# Altium PCB ATSAM4C-CB.PcbDoc (part 1 of 2)
Units mil, origin at the board's own origin, x right, y up, seen from the top; angles counter-clockwise.
Board outline 3937.01 x 5511.81 mil, 2 copper layers (Top Layer, Bottom Layer); 213 components, 172 nets, 705 pads, 473 vias.
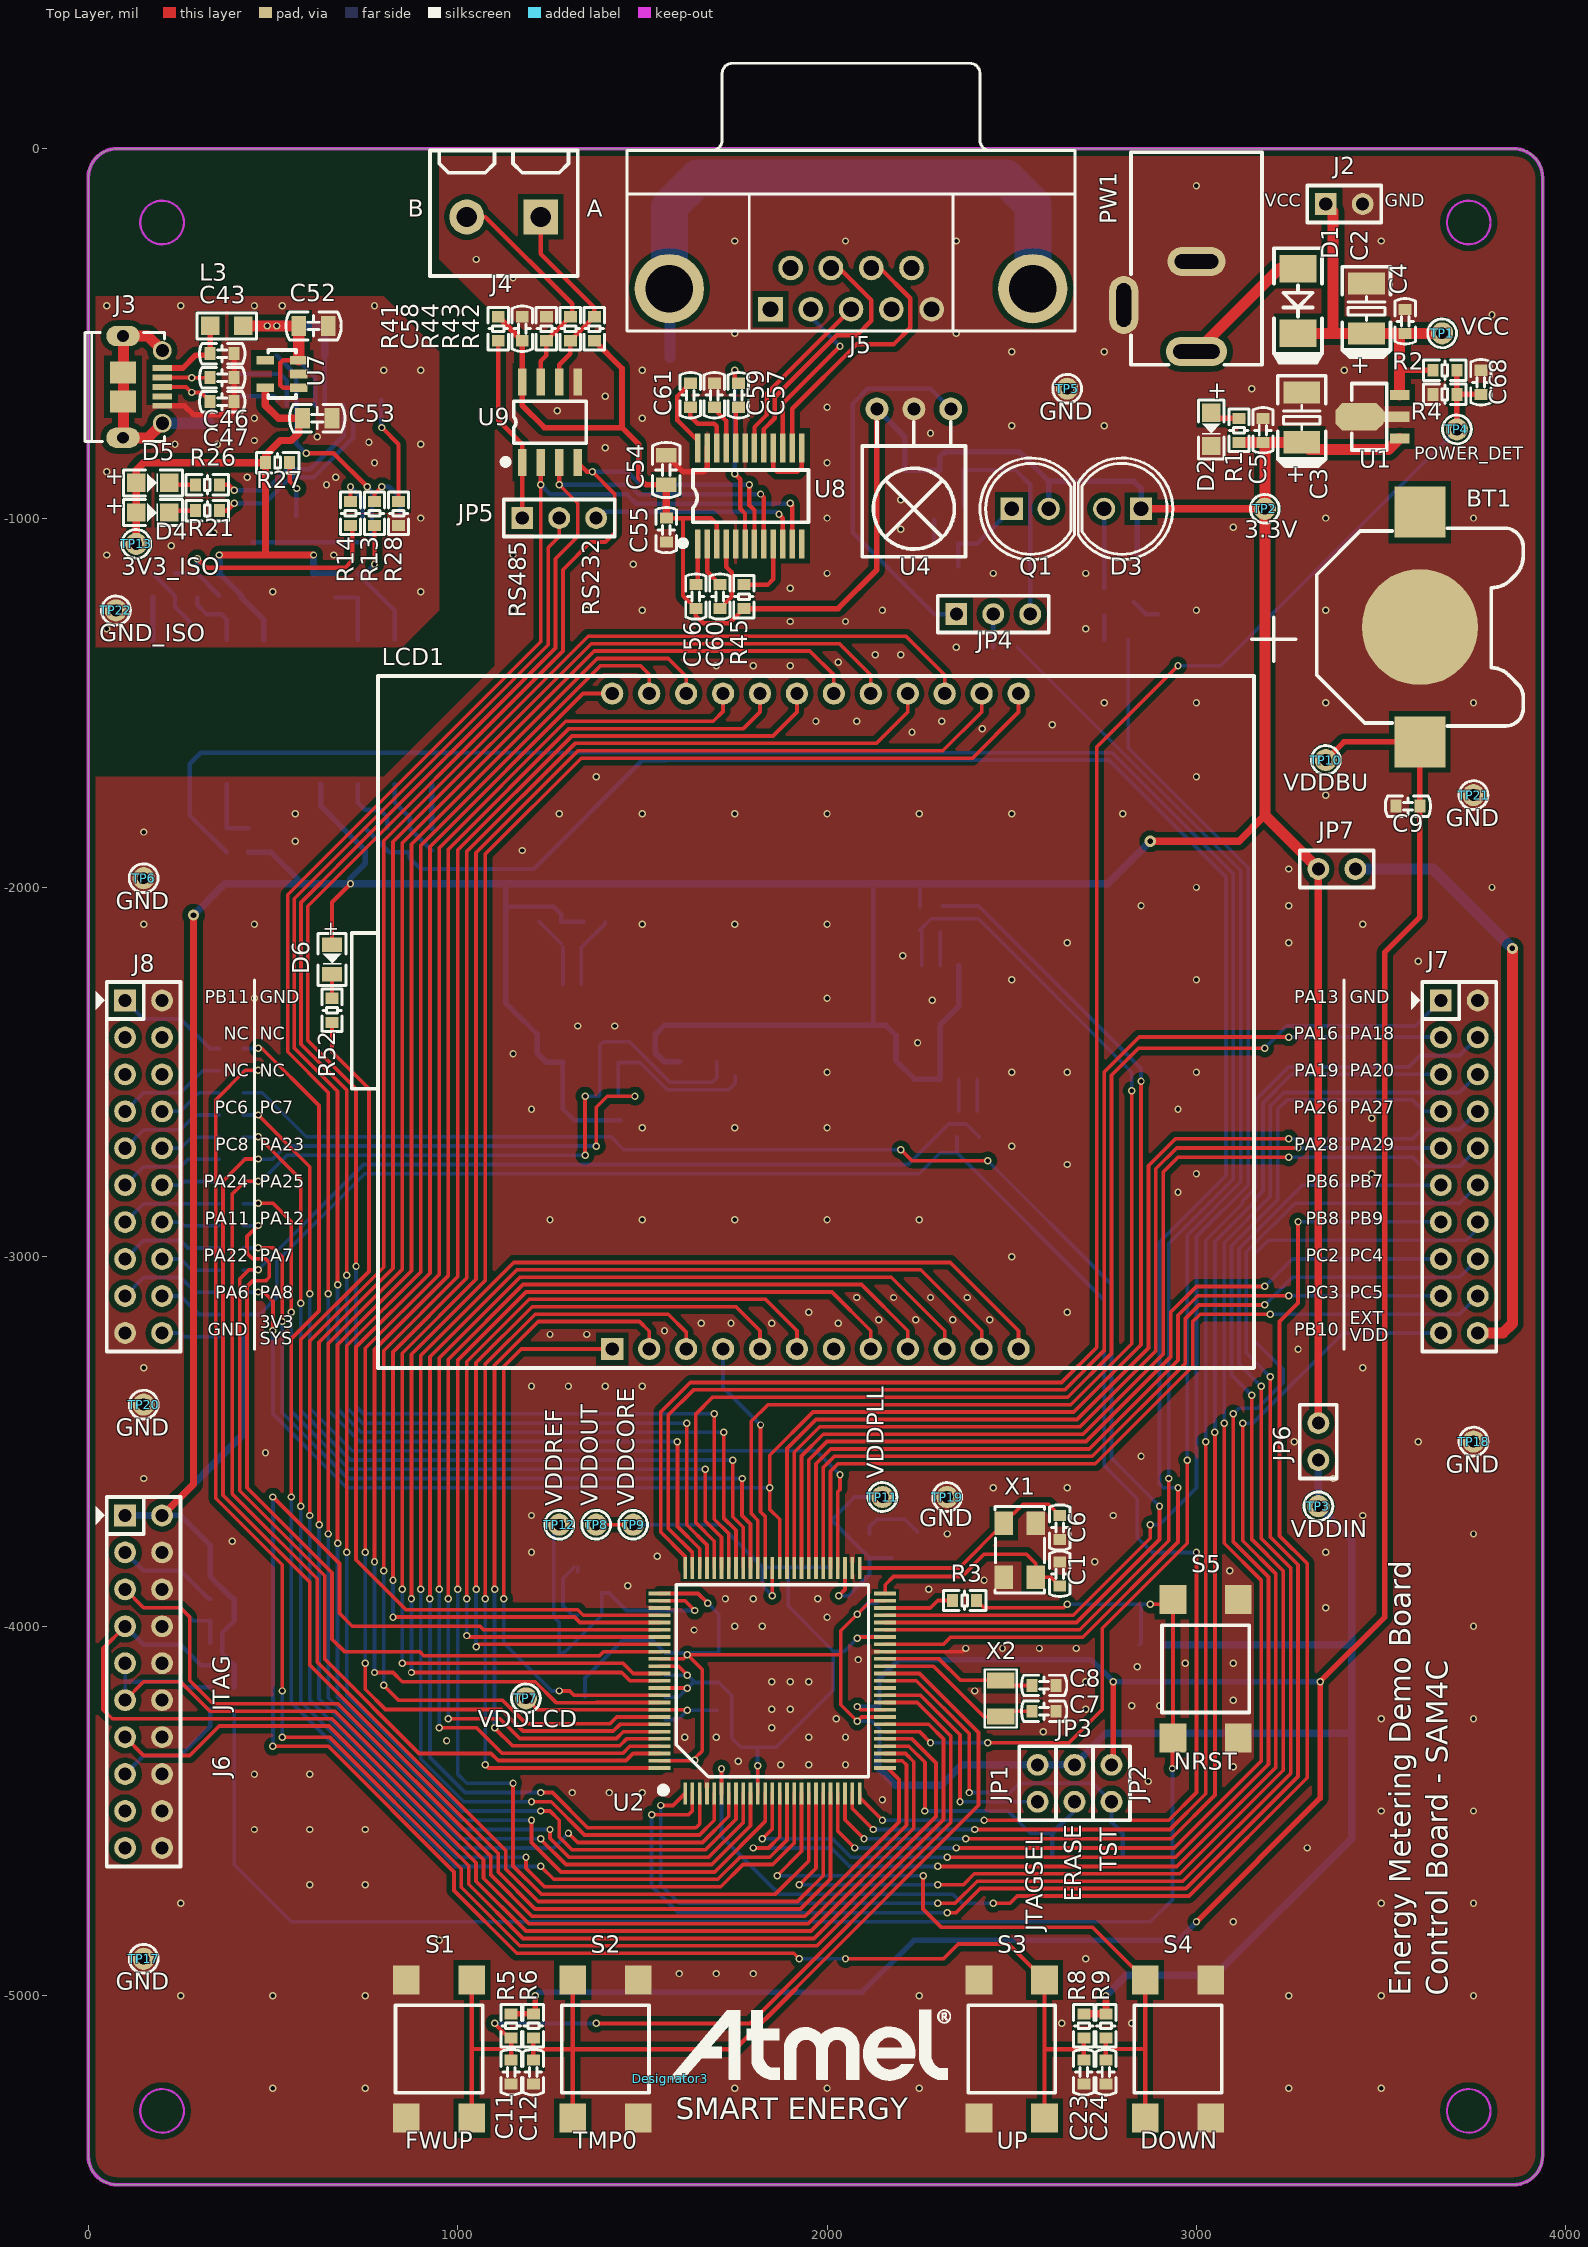
[diagram p0: Top Layer view]
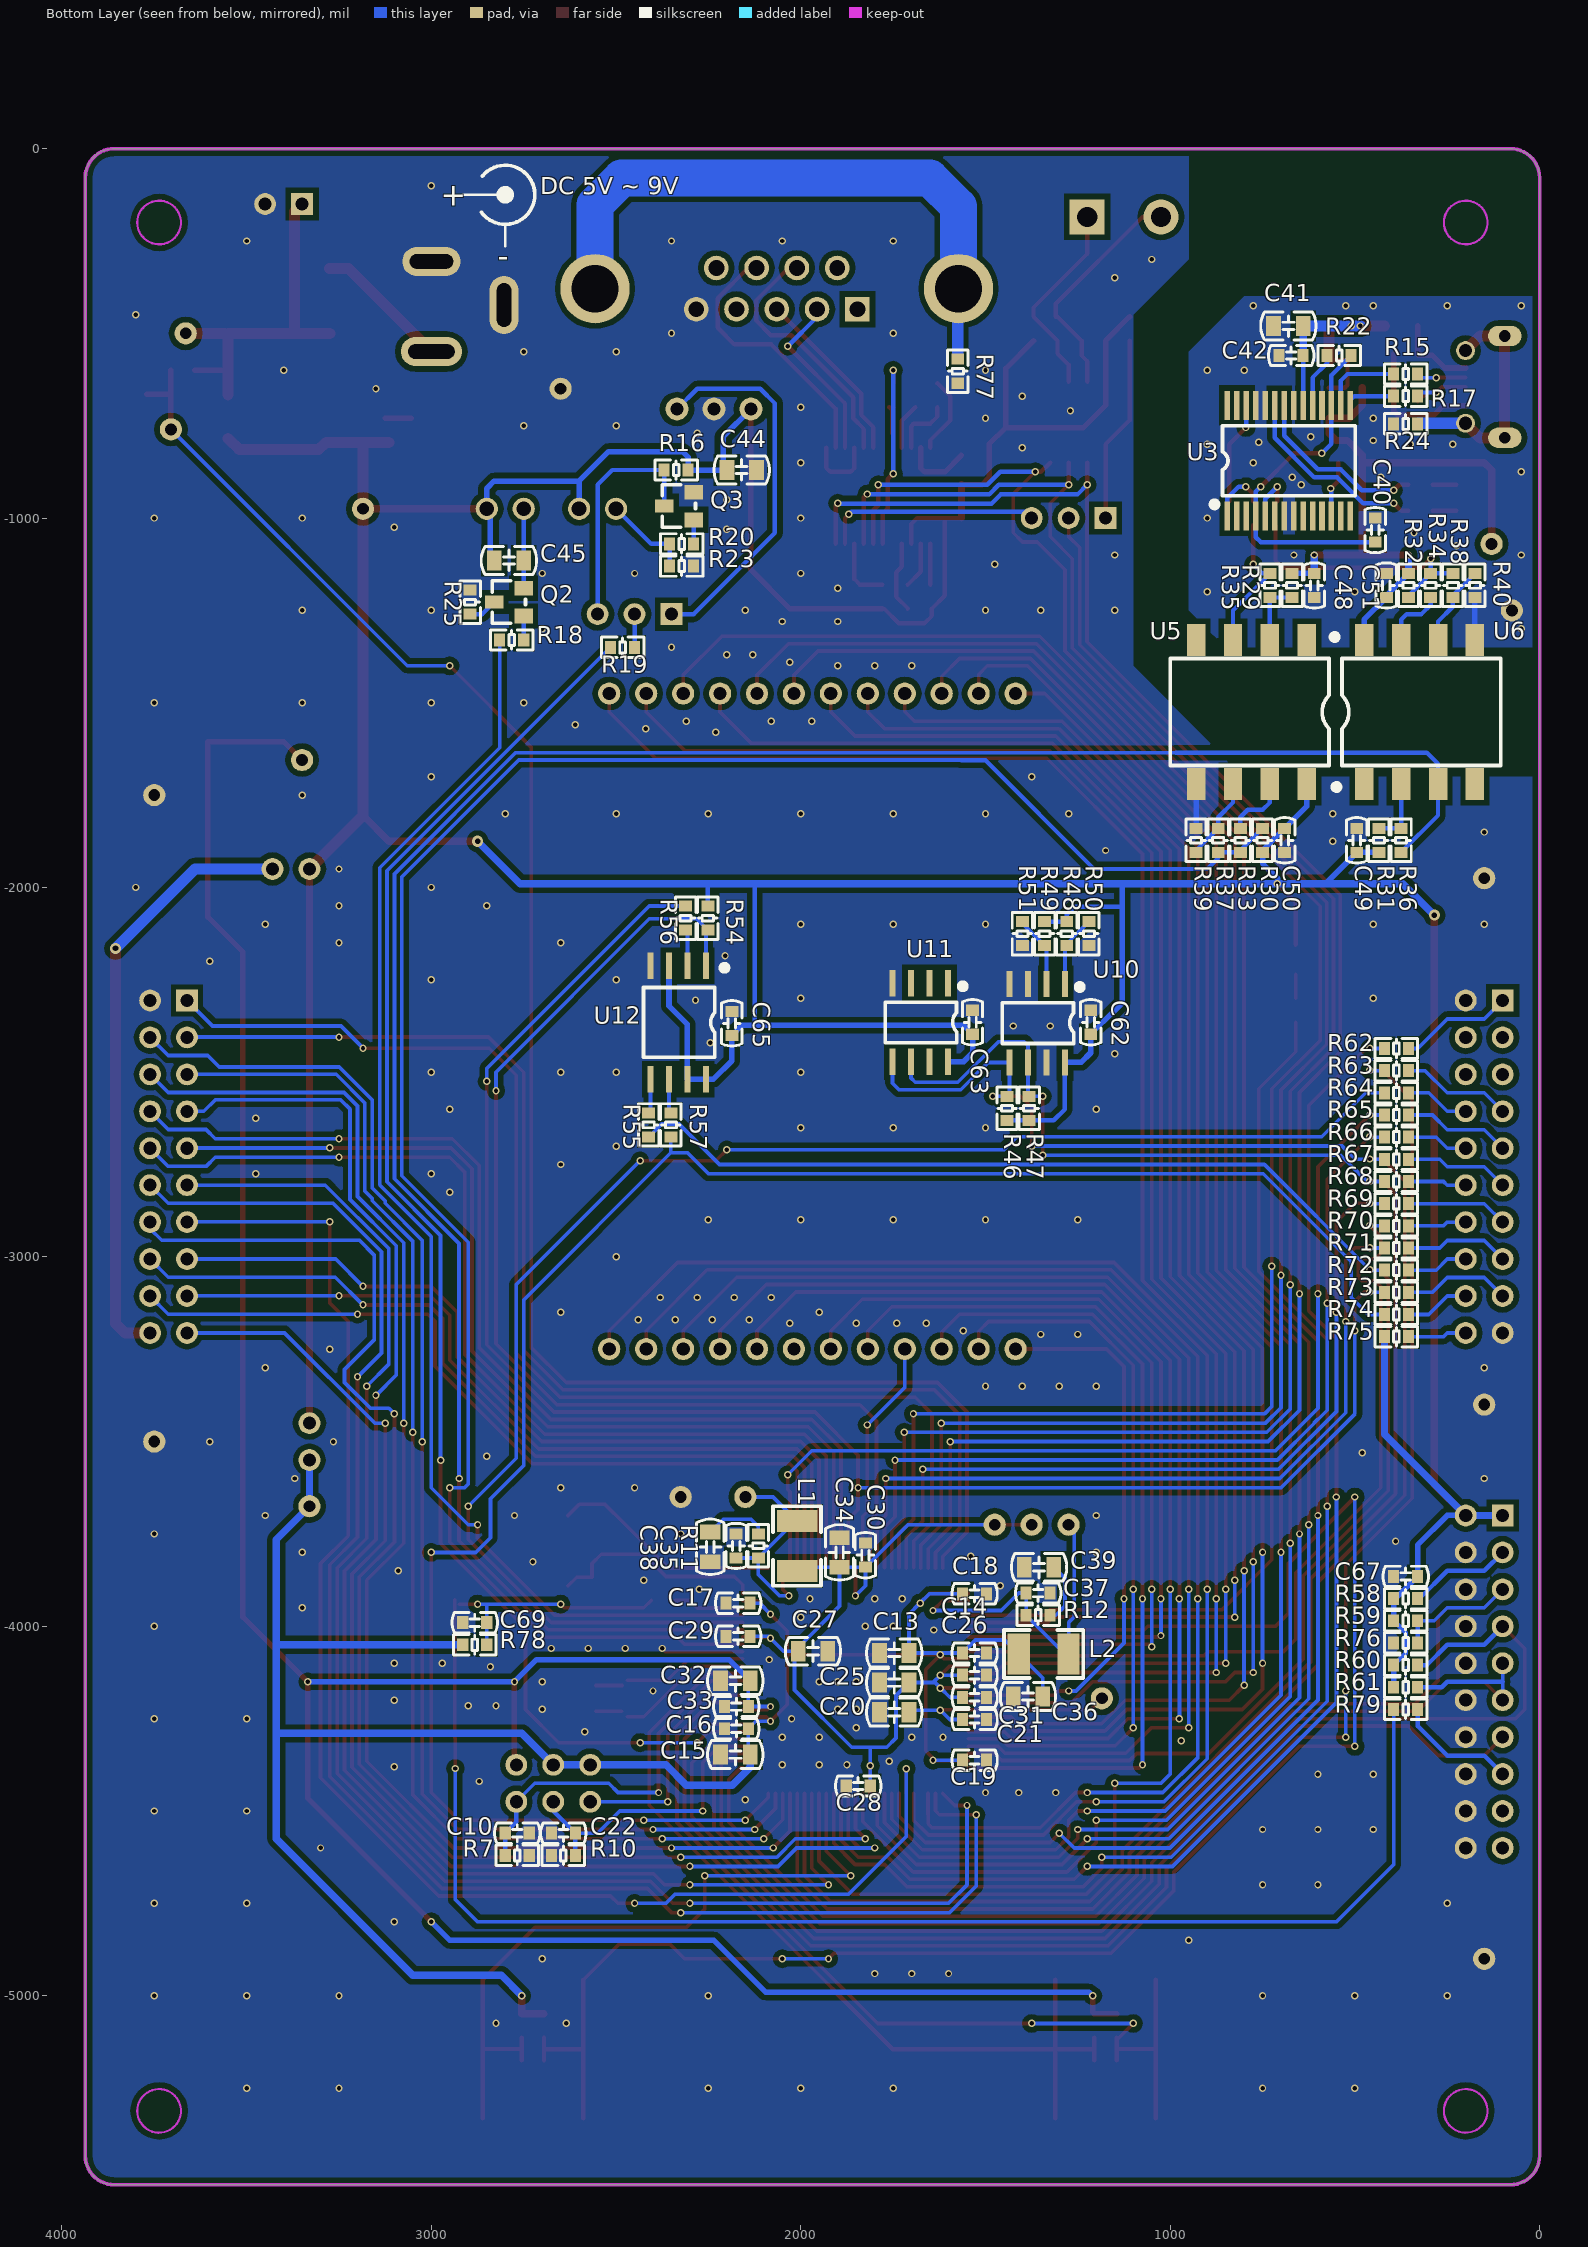
[diagram p1: Bottom Layer view, seen from below]

## Layer stack, top to bottom
Top Layer: signal copper 1.4
Dielectric: dielectric 12.6, FR-4, Dk 4.8
Bottom Layer: signal copper 1.4

## Board outline
0,-5433.07 ccw(c78.74,-5433.07) 78.74,-5511.81 3858.27,-5511.81 ccw(c3858.27,-5433.07) 3937.01,-5433.07 3937.01,-78.74 ccw(c3858.27,-78.74) 3858.27,0 78.74,0 ccw(c78.74,-78.74) 0,-78.74

## Design rules (kind name [scope] priority, off if disabled: settings)
Clearance LQFP-100 [InComponent('U2')] p1: gap=8
Clearance Polygon [IsRegion] p2: gap=15
Clearance [All] p3: gap=8
MinimumSolderMaskSliver [All] p1 off: minsoldermaskwidth=10
NetAntennae [All] p1 off: netantennaetolerance=0
PolygonConnect [All] p1: connectstyle=Direct reliefconductorwidth=10 reliefentries=4 polygonreliefangle="90 Angle" airgapwidth=10
RoutingVias [All] p1: holewidth=28 width=50 viastyle="Through Hole" minholewidth=28 minwidth=50 maxholewidth=28 maxwidth=50
SilkToSilkClearance [All] p1 off: silktosilkclearance=10
SilkscreenOverComponentPads [All] p1 off: minsilkscreentomaskgap=10
SolderMaskExpansion [All] p1: expansion=4
Width [All] p1: maxlimit=100 minlimit=10 preferedwidth=10
24 further rules are at their usual default settings.

## Classes and differential pairs
component class "1 - MCU": BT1 C1 C2 C3 C4 C5 C6 C7 C8 C9 C10 C11 C12 C13 C14 C15 C16 C17 C18 C19 C20 C21 C22 C23 C24 C25 C26 C27 C28 C29 C30 C31 C32 C33 C34 C35 C36 C37 C38 C39 C68 C69 D1 D2 J2 JP1 JP2 JP3 JP6 JP7 L1 L2 PW1 R1 R2 R3 R4 R5 R6 R7 R8 R9 R10 R11 R12 R78 S1 S2 S3 S4 S5 TP1 TP2 TP3 TP4 TP5 TP6 TP7 TP8 TP9 TP10 TP11 TP12 TP17 TP18 TP19 TP20 TP21 U1 U2 X1 X2
component class "2 - Communication": C40 C41 C42 C43 C44 C45 C46 C47 C48 C49 C50 C51 C52 C53 C54 C55 C56 C57 C58 C59 C60 C61 D3 D4 D5 J3 J4 J5 JP4 JP5 L3 Q1 Q2 Q3 R13 R14 R15 R16 R17 R18 R19 R20 R21 R22 R23 R24 R25 R26 R27 R28 R29 R30 R31 R32 R33 R34 R35 R36 R37 R38 R39 R40 R41 R42 R43 R44 R45 R77 TP13 TP22 U3 U4 U5 U6 U7 U8 U9
component class "3 - Periphery": C62 C63 C65 C67 D6 J6 J7 J8 LCD1 R46 R47 R48 R49 R50 R51 R52 R54 R55 R56 R57 R58 R59 R60 R61 R62 R63 R64 R65 R66 R67 R68 R69 R70 R71 R72 R73 R74 R75 R76 R79 U10 U11 U12

## Components (designator, comment, footprint, x,y, rotation, side; value= is the part's Value field where it differs from the comment)
BT1 "3000TR" X-S_3000_01 3605,-1295 r270 top
C1 "20pF" C0603 2630,-3825.55 r270 top
C2 "47uF" C_TANT_B3528 3460,-500 r90 top
C3 "22uF" C_TANT_B3528 3285,-795 r90 top
C4 "0.1uF" C0603 3565,-435 r270 top
C5 "0.1uF" C0603 3180,-730 r270 top
C6 "20pF" C0603 2630,-3765 r90 top
C7 "20pF" C0603 2620,-4230 r180 top
C8 "20pF" C0603 2620,-4160 r180 top
C9 "0.1uF" C0603 3540,-1780 r0 top
C10 "0.1uF" C0603 2735,-4560 r0 bottom
C11 "0.1uF" C0603 1145,-5239.29 r90 top
C12 "0.1uF" C0603 1205,-5239.29 r90 top
C13 "10uF" C0805 1787.01,-4072.24 r180 bottom
C14 "0.1uF" C0603 1497.01,-4072.24 r0 bottom
C15 "10uF" C0805 2217.01,-4347.24 r180 bottom
C16 "0.1uF" C0603 2207.01,-4277.24 r180 bottom
C17 "0.1uF" C0603 2202.01,-3937.24 r180 bottom
C18 "0.1uF" C0603 1497.01,-3912.24 r0 bottom
C19 "0.1uF" C0603 1497.01,-4362.24 r0 bottom
C20 "2.2uF" C0805 1787.01,-4232.24 r180 bottom
C21 "0.1uF" C0603 1497.01,-4252.24 r0 bottom
C22 "0.1uF" C0603 2675,-4560 r180 bottom
C23 "0.1uF" C0603 2695,-5239.29 r90 top
C24 "0.1uF" C0603 2755,-5239.29 r90 top
C25 "2.2uF" C0805 1787.01,-4152.24 r180 bottom
C26 "0.1uF" C0603 1497.01,-4132.24 r0 bottom
C27 "2.2uF" C0805 1927.01,-4067.24 r0 bottom
C28 "0.1uF" C0603 1877.01,-4432.24 r180 bottom
C29 "0.1uF" C0603 2202.01,-4027.24 r180 bottom
C30 "0.1uF" C0603 1825,-3775 r270 bottom
C31 "0.1uF" C0603 1497.01,-4192.24 r0 bottom
C32 "2.2uF" C0805 2217.01,-4147.24 r180 bottom
C33 "0.1uF" C0603 2207.01,-4217.24 r180 bottom
C34 "2.2uF" C0805 1895,-3760 r270 bottom
C35 "0.1uF" C0603 2175,-3750 r270 bottom
C36 "2.2uF" C0805 1425,-4190 r180 bottom
C37 "0.1uF" C0603 1325,-3910 r0 bottom
C38 "2.2uF" C0805 2245,-3825 r90 bottom
C39 "2.2uF" C0805 1395,-3840 r180 bottom
C40 "0.1uF" C0603 445,-1000 r270 bottom
C41 "4.7uF" C0805 720,-480 r180 bottom
C42 "0.1uF" C0603 705,-560 r180 bottom
C43 "0.1uF" C0603 395,-555 r180 top
C44 "2.2uF" C0805 2120,-870 r0 bottom
C45 "2.2uF" C0805 2750,-1115 r0 bottom
C46 "47pF" C0603 395,-620 r180 top
C47 "47pF" C0603 395,-685 r180 top
C48 "0.1uF" C0603 610,-1215 r90 bottom
C49 "0.1uF" C0603 495,-1840 r270 bottom
C50 "0.1uF" C0603 690,-1905 r90 bottom
C51 "0.1uF" C0603 415,-1150 r270 bottom
C52 "1uF" C0805 650,-480 r180 top
C53 "1uF" C0805 660,-730 r180 top
C54 "4.7uF" C0805 1565,-830 r270 top
C55 "0.1uF" C0603 1565,-1000 r270 top
C56 "0.1uF" C0603 1645,-1180 r270 top
C57 "0.1uF" C0603 1760,-700 r90 top
C58 "0.1uF" C0603 1175,-520 r90 top
C59 "0.1uF" C0603 1695,-635 r270 top
C60 "0.1uF" C0603 1710,-1245 r90 top
C61 "0.1uF" C0603 1630,-700 r90 top
C62 "0.1uF" C0603 1215,-2332.44 r270 bottom
C63 "0.1uF" C0603 1535,-2332.44 r270 bottom
C65 "0.1uF" C0603 2186.69,-2335.43 r270 bottom
C67 "0.1uF" C0603 395,-3865 r180 bottom
C68 "0.1uF" C0603 3770,-600 r270 top
C69 "0.1uF" C0603 2915,-3990 r180 bottom
D1 "1N4147" DIODE-SMD 3275,-325 r270 top
D2 "LED" LED-0805 3040,-715 r270 top
D3 "IR" LED-5mm 2800,-975 r180 top
D4 "LED" LED-0805 130,-985 r0 top
D5 "LED" LED-0805 130,-905 r0 top
D6 "LED" LED-0805G 660,-2195 r270 top
Designator3 "Comment" LOGO-ATMEL 1575,-5225 r0 top
J2 "HDR1X2" HDR1X2(None) 3350,-150 r0 top
J3 "105017-0001" micro_usb_dip_b 110,-645 r0 top
J4 "Terminal-Screw-2" TE-1776119-2 1225,-185 r180 top
J5 "D Connector 9" DSUB1.385-2H9 2065,-5 r0 top
J6 "HDR2X10" HDR2X10 100,-3700 r270 top
J7 "HDR2X10" HDR2X10 3661.42,-2305.91 r270 top locked
J8 "HDR2X10" HDR2X10 100,-2305.91 r270 top locked
JP1 "JMP" JMP 2570,-4375 r270 top
JP2 "JMP" JMP 2770,-4475 r90 top
JP3 "JMP" JMP 2670,-4475 r90 top
JP4 "JMP3" JMP3 2350,-1260 r0 top
JP5 "JMP3" JMP3 1175,-1000 r0 top
JP6 "JMP" JMP 3330,-3450 r270 top
JP7 "JMP" JMP 3330,-1950 r0 top
L1 "56uH" 1210 2010,-3850 r90 bottom
L2 "56uH" 1210 1410,-4075 r180 bottom
L3 "220ohm @100MHZ" 0805 330,-480 r0 top
LCD1 "JY12298" LCD_JY12298 1968.5,-2362.2 r0 top locked
PW1 "PowerJack" POWERJACKET2.5 3000,-549.37 r180 top
Q1 "PT334-6C" LED-DIP-100 2550,-975 r0 top
Q2 "PNP" SOT-23 2750,-1265 r90 bottom
Q3 "NPN" SOT-23 2290,-1005 r90 bottom
R1 "510R" R0603 3115,-730 r270 top
R2 "680K" R0603 3705,-600 r180 top
R3 "0R" R0603 2340,-3930 r0 top
R4 "240K" R0603 3640,-665 r0 top
R5 "10K" R0603 1145,-5114.29 r90 top
R6 "10K" R0603 1205,-5114.29 r90 top
R7 "10K" R0603 2800,-4620 r180 bottom
R8 "10K" R0603 2695,-5114.29 r90 top
R9 "10K" R0603 2755,-5114.29 r90 top
R10 "10K" R0603 2610,-4620 r0 bottom
R11 "2R2" R0603 2115,-3750 r270 bottom
R12 "2R2" R0603 1325,-3970 r0 bottom
R13 "0R" R0603 775,-955 r270 top
R14 "0R" R0603 710,-955 r270 top
R15 "0R" R0603 330,-610 r0 bottom
R16 "10K" R0603 2370,-870 r180 bottom
R17 "0R" R0603 330,-670 r0 bottom
R18 "1K" R0603 2815,-1330 r180 bottom
R19 "1K" R0603 2515,-1350 r180 bottom
R20 "270R" R0603 2290,-1070 r0 bottom
R21 "1K" R0603 355,-980 r180 top
R22 "10K" R0603 510,-560 r0 bottom
R23 "1K5" R0603 2290,-1130 r0 bottom
R24 "0R" R0603 330,-745 r0 bottom
R25 "100R" R0603 2895,-1195 r270 bottom
R26 "1K" R0603 355,-910 r180 top
R27 "10K" R0603 545,-850 r180 top
R28 "0R" R0603 840,-955 r270 top
R29 "150R" R0603 670,-1215 r90 bottom
R30 "3K3" R0603 750,-1840 r270 bottom
R31 "150R" R0603 435,-1840 r270 bottom
R32 "3.3K" R0603 355,-1215 r90 bottom
R33 "10K" R0603 810,-1905 r90 bottom
R34 "10K" R0603 295,-1150 r270 bottom
R35 "10K" R0603 730,-1150 r270 bottom
R36 "10K" R0603 375,-1905 r90 bottom
R37 "0R" R0603 870,-1905 r90 bottom
R38 "0R" R0603 235,-1150 r270 bottom
R39 "100K" R0603 930,-1840 r270 bottom
R40 "100K" R0603 175,-1215 r90 bottom
R41 "47K" R0603 1110,-455 r270 top
R42 "10K" R0603 1370,-455 r270 top
R43 "10K" R0603 1305,-520 r90 top
R44 "10K" R0603 1240,-455 r270 top
R45 "47K" R0603 1775,-1180 r270 top
R46 "10K" R0603 1441.69,-2565.43 r270 bottom
R47 "10K" R0603 1381.69,-2565.43 r270 bottom
R48 "0R" R0603 1280,-2157.44 r90 bottom
R49 "0R" R0603 1340,-2157.44 r90 bottom
R50 "0R" R0603 1220,-2157.44 r90 bottom
R51 "0R" R0603 1400,-2157.44 r90 bottom
R52 "470R" R0603 660,-2365 r90 top
R54 "470K" R0603 2251.69,-2115.43 r90 bottom
R55 "33R" R0603 2411.69,-2675.43 r90 bottom
R56 "33R" R0603 2311.69,-2050.43 r270 bottom
R57 "33R" R0603 2351.69,-2675.43 r90 bottom
R58 "100K" R0603 330,-3925 r0 bottom
R59 "100K" R0603 330,-3985 r0 bottom
R60 "100K" R0603 330,-4105 r0 bottom
R61 "100K" R0603 330,-4165 r0 bottom
R62 "0R" R0603 420,-2435.91 r180 bottom
R63 "0R" R0603 420,-2495.91 r180 bottom
R64 "0R" R0603 355,-2555.91 r0 bottom
R65 "0R" R0603 420,-2615.91 r180 bottom
R66 "0R" R0603 355,-2675.91 r0 bottom
R67 "0R" R0603 420,-2735.91 r180 bottom
R68 "0R" R0603 355,-2795.91 r0 bottom
R69 "0R" R0603 420,-2855.91 r180 bottom
R70 "0R" R0603 355,-2915.91 r0 bottom
R71 "0R" R0603 420,-2975.91 r180 bottom
R72 "0R" R0603 355,-3035.91 r0 bottom
R73 "0R" R0603 420,-3095.91 r180 bottom
R74 "0R" R0603 355,-3155.91 r0 bottom
R75 "0R" R0603 355,-3215.91 r0 bottom
R76 "4K7" R0603 395,-4045 r180 bottom
R77 "0R" R0603 1575,-635 r90 bottom
R78 "10K" R0603 2850,-4050 r0 bottom
R79 "0R" R0603 330,-4225 r0 bottom
S1 "KEY" "KEY-4P - SMD" 950,-5144.29 r90 top
S2 "KEY" "KEY-4P - SMD" 1400,-5144.29 r270 top
S3 "KEY" "KEY-4P - SMD" 2500,-5144.29 r90 top
S4 "KEY" "KEY-4P - SMD" 2950,-5144.29 r270 top
S5 "KEY" "KEY-4P - SMD" 3025,-4115 r270 top
TP1 "VCC" TP 3665,-500 r0 top
TP2 "3.3V" TP 3185,-975 r0 top
TP3 "VDDIN" TP 3330,-3675 r0 top
TP4 "POWER_DET" TP 3705,-760 r0 top
TP5 "GND" TP 2650,-650 r0 top
TP6 "GND" TP 150,-1975 r0 top
TP7 "VDDLCD" TP 1185,-4195 r0 top
TP8 "VDDOUT" TP 1375,-3725 r0 top
TP9 "VDDCORE" TP 1475,-3725 r0 top
TP10 "VDDBU" TP 3350,-1655 r90 top
TP11 "VDDPLL" TP 2150,-3650 r90 top
TP12 "VDDREF" TP 1275,-3725 r90 top
TP13 "3V3_ISO" TP 130,-1070 r90 top
TP17 "GND" TP 150,-4900 r90 top
TP18 "GND" TP 3750,-3500 r90 top
TP19 "GND" TP 2325,-3650 r90 top
TP20 "GND" TP 150,-3400 r90 top
TP21 "GND" TP 3750,-1750 r90 top
TP22 "GND_ISO" TP 75,-1250 r90 top
U1 "78L33" SOT-89 3550,-785 r90 top
U2 "AT91SAM4C16C" LQFP-100 1852.01,-4147.24 r90 top
U3 "FT232RL" SSOP-28 845,-995 r90 bottom
U4 "IR-RX" IR-Rx 2335,-705 r180 top
U5 "SFH6345-X007" SO08-400 780,-1525 r270 bottom
U6 "SFH6345-X007" SO08-400 325,-1525 r90 bottom
U7 "TLV70033QDDCRQ1" SOT23-5 525,-610 r0 top
U8 "ADM3312EA" TSSOP-24 1650,-1070 r90 top
U9 "ADM3485" SOP-8 1175,-850 r90 top
U10 "AT24C1024BN-SH25-S" SO8 1360,-2367.44 r270 bottom
U11 "ATSHA204-SH-DA-T" SO8 1676.69,-2365.43 r270 bottom
U12 "AT25DF321A-SH-T" SOIC8 2331.69,-2365.43 r270 bottom
X1 "8.192MHz" crystal_5032 2521.69,-3793.54 r90 top
X2 "32.768KHz" CFPX-217 2470,-4195.55 r90 top

## Footprints (in the part's own frame and the unit in brackets; to place one, negate y for a bottom-side part, rotate by r counter-clockwise, add the part's x,y. Pads: shape width x height; smd on the part's side, far side on the other; paste and mask are expansions set on the pad)
0805 [mil] "0805"
  rect 50x50 smd: 1(0,0) 2(90,0)
  silkscreen extent -35,-35 125,35
1210 [mil] "R1206"
  rect 60x110 smd: 1(0,0) 2(135,0)
  silkscreen extent -40,-65 175,65
C0603 [mil] "C0603"
  rect 30x35 smd: 1(0,0) 2(65,0)
  silkscreen extent -29,-28 94,28
C0805 [mil] "C0805"
  rect 40x55 smd: 1(0,0) 2(80,0)
  silkscreen extent -35,-38 115,38
C_TANT_B3528 [mil] "C_TANT_B3528"
  rect 60x100 smd: 1(0,0) 2(135,0)
  silkscreen extent -65,-65 180,65
CFPX-217 [mm] "CFPX-217"
  rect 1.1x1.9 smd: 1(-1.25,0) 2(1.25,0)
  silkscreen extent -2,-1.1 2,1.1
crystal_5032 [mm] "CRYSTAL_5032"
  rect 1.6x1.25 smd: 1(-1.867,-1.105) 2(1.833,-1.105) 3(1.833,1.095) 4(-1.867,1.095)
  silkscreen extent -2.96,-1.71 2.98,1.71
DIODE-SMD [mil] "DIODE-SMD"
  rect 75x100 smd: A(0,0) K(175,0)
  silkscreen extent -55,-65 255,65
DSUB1.385-2H9 [mm] "Connector; D Subminiature; 9 Position; Right Angle; Pitch 1.385 mm"
  rect 1.69x1.69 hole 1.09: 1(-5.54,-10.92)
  round 1.69 hole 1.09: 2(-2.77,-10.92) 3(0,-10.92) 4(2.77,-10.92) 5(5.54,-10.92) 6(-4.155,-8.08) 7(-1.385,-8.08) 8(1.385,-8.08) 9(4.155,-8.08)
  round 4.76 hole 3.26: 10(-12.495,-9.5) 11(12.495,-9.5)
  silkscreen extent -15.4,-12.4 15.4,6
HDR1X2(None) [mm]
  rect 1.5x1.5 hole 0.9: 1(0,0)
  round 1.5 hole 0.9: 2(2.54,0)
  silkscreen extent -1.27,-1.27 3.81,1.27
HDR2X10 [mm]
  rect 1.5x1.5 hole 0.9: 1(0,0)
  round 1.5 hole 0.9: 2(0,2.54) 3(2.54,0) 4(2.54,2.54) 5(5.08,0) 6(5.08,2.54) 7(7.62,0) 8(7.62,2.54) 9(10.16,0) 10(10.16,2.54) 11(12.7,0) 12(12.7,2.54) 13(15.24,0) 14(15.24,2.54) 15(17.78,0) 16(17.78,2.54) 17(20.32,0) 18(20.32,2.54) 19(22.86,0) 20(22.86,2.54)
  silkscreen extent -1.27,-2.03 24.13,3.81
IR-Rx [mil] "IR-Rx"
  round 62 hole 35: 1(0,0) 2(100,0) 3(200,0)
  silkscreen extent -40,35 240,400
JMP [mm] "JMP"
  round 1.5 hole 0.9: 1(0,0) 2(2.54,0)
  silkscreen extent -1.27,-1.27 3.81,1.27
JMP3 [mm]
  rect 1.5x1.5 hole 0.9: 1(0,0)
  round 1.5 hole 0.9: 2(2.54,0) 3(5.08,0)
  silkscreen extent -1.27,-1.27 6.35,1.27
"KEY-4P - SMD" [mm]
  rect 2x1.829 smd: 1(-4.75,2.25) 1(4.75,2.25) 2(-4.75,-2.25) 2(4.75,-2.25)
  silkscreen extent -3,-3 3,3
LCD_JY12298 [mil] "DIP24_LCD"
  rect 60x60 / inner round 60 / far side round 60 hole 36: 1(-550,-887.2)
  round 60 hole 36: 2(-450,-887.2) 3(-350,-887.2) 4(-250,-887.2) 5(-150,-887.2) 6(-50,-887.2) 7(50,-887.2) 8(150,-887.2) 9(250,-887.2) 10(350,-887.2) 11(450,-887.2) 12(550,-887.2) 13(550,887.2) 14(450,887.2) 15(350,887.2) 16(250,887.2) 17(150,887.2) 18(50,887.2) 19(-50,887.2) 20(-150,887.2) 21(-250,887.2) 22(-350,887.2) 23(-450,887.2) 24(-550,887.2)
  silkscreen extent -1255,-938 1187,935
LED-5mm [mil] "LED-DIP-100"
  rect 60x60 / inner round 60 / far side round 60 hole 40: A(-50,0)
  round 60 hole 40: K(50,0)
  silkscreen extent -136,-138 120,138
LED-0805 [mil] "LED-0805"
  rect 50x50 smd: A(0,0) K(90,0)
  silkscreen extent -35,-35 125,35
LED-0805G [mil] "LED 0805, Green"
  rect 40x55 smd: A(-40,0) K(40,0)
  silkscreen extent -70,-38 70,38
LED-DIP-100 [mil] "LED-DIP-100"
  rect 60x60 / inner round 60 / far side round 60 hole 40: 1(-50,0)
  round 60 hole 40: 2(50,0)
  silkscreen extent -136,-138 120,138
LOGO-ATMEL [mil] "Atmel logo"
  silkscreen extent 0,-4 760,187
LQFP-100 [mil] "QFP100-20-630"
  rect 60x10 smd: 1(-305.32,236.22) 2(-305.32,216.54) 3(-305.32,196.85) 4(-305.32,177.17) 5(-305.32,157.48) 6(-305.32,137.8) 7(-305.32,118.11) 8(-305.32,98.43) 9(-305.32,78.74) 10(-305.32,59.06) 11(-305.32,39.37) 12(-305.32,19.69) 13(-305.32,0) 14(-305.32,-19.69) 15(-305.32,-39.37) 16(-305.32,-59.06) 17(-305.32,-78.74) 18(-305.32,-98.43) 19(-305.32,-118.11) 20(-305.32,-137.8) 21(-305.32,-157.48) 22(-305.32,-177.17) 23(-305.32,-196.85) 24(-305.32,-216.54) 25(-305.32,-236.22) 51(305.32,-236.22) 52(305.32,-216.54) 53(305.32,-196.85) 54(305.32,-177.17) 55(305.32,-157.48) 56(305.32,-137.8) 57(305.32,-118.11) 58(305.32,-98.43) 59(305.32,-78.74) 60(305.32,-59.06) 61(305.32,-39.37) 62(305.32,-19.69) 63(305.32,0) 64(305.32,19.69) 65(305.32,39.37) 66(305.32,59.06) 67(305.32,78.74) 68(305.32,98.43) 69(305.32,118.11) 70(305.32,137.8) 71(305.32,157.48) 72(305.32,177.17) 73(305.32,196.85) 74(305.32,216.54) 75(305.32,236.22)
  rect 10x60 smd: 26(-236.22,-305.32) 27(-216.54,-305.32) 28(-196.85,-305.32) 29(-177.17,-305.32) 30(-157.48,-305.32) 31(-137.8,-305.32) 32(-118.11,-305.32) 33(-98.43,-305.32) 34(-78.74,-305.32) 35(-59.06,-305.32) 36(-39.37,-305.32) 37(-19.69,-305.32) 38(0,-305.32) 39(19.69,-305.32) 40(39.37,-305.32) 41(59.06,-305.32) 42(78.74,-305.32) 43(98.43,-305.32) 44(118.11,-305.32) 45(137.8,-305.32) 46(157.48,-305.32) 47(177.17,-305.32) 48(196.85,-305.32) 49(216.54,-305.32) 50(236.22,-305.32) 76(236.22,305.32) 77(216.54,305.32) 78(196.85,305.32) 79(177.17,305.32) 80(157.48,305.32) 81(137.8,305.32) 82(118.11,305.32) 83(98.43,305.32) 84(78.74,305.32) 85(59.06,305.32) 86(39.37,305.32) 87(19.69,305.32) 88(0,305.32) 89(-19.69,305.32) 90(-39.37,305.32) 91(-59.06,305.32) 92(-78.74,305.32) 93(-98.43,305.32) 94(-118.11,305.32) 95(-137.8,305.32) 96(-157.48,305.32) 97(-177.17,305.32) 98(-196.85,305.32) 99(-216.54,305.32) 100(-236.22,305.32)
  silkscreen extent -304,-260 260,303
micro_usb_dip_b [mm] "MICRO_USB_DIP_B"
  rect 1.35x0.4 smd: 1(2.3,1.3) 2(2.3,0.65) 3(2.3,0) 4(2.3,-0.65) 5(2.3,-1.3)
  oval 2.3x1.4 hole 0.8: 6(-0.4,3.5) 7(-0.4,-3.5)
  round 1.3 hole 0.9: 8(2.3,2.5) 9(2.3,-2.5)
  rect 1.8x1.5 smd: 10(-0.4,1) 11(-0.4,-1)
  silkscreen extent -3,-3.75 2.45,3.75
POWERJACKET2.5 [mm] "PowerJacket2.5"
  oval 4.2x2 hole 1 slot 3.2 at 0 deg: 1(0,0)
  oval 4x2 hole 1 slot 3 at 0 deg: 2(0,-6.2)
  oval 2x4 hole 1 slot 3 at 90 deg: 3(5,-3.2)
  silkscreen extent -4.5,-13.7 4.5,0.9
R0603 [mil] "R0603"
  rect 30x35 smd: 1(0,0) 2(65,0)
  silkscreen extent -25,-28 90,28
SO8 [mil] "SO8"
  rect 71x17 smd: 1(-106.3,75) 2(-106.3,25) 3(-106.3,-25) 4(-106.3,-75) 5(106.3,-75) 6(106.3,-25) 7(106.3,25) 8(106.3,75)
  silkscreen extent -106,-94 55,123
SO08-400 [mil] "SO08-400"
  rect 87x50 smd: 1(-195,150) 2(-195,50) 3(-195,-50) 4(-195,-150) 5(195,-150) 6(195,-50) 7(195,50) 8(195,150)
  silkscreen extent -211,-220 145,233
SOIC8 [mil] "SOIC8-200MIL"
  rect 71x17 smd: 1(-153.54,75) 2(-153.54,25) 3(-153.54,-25) 4(-153.54,-75) 5(153.54,-75) 6(153.54,-25) 7(153.54,25) 8(153.54,75)
  silkscreen extent -156,-94 94,133
SOP-8 [mm] "SOP-8"
  rect 1.85x0.6 smd: 1(0,0) 2(0,-1.27) 3(0,-2.54) 4(0,-3.81) 5(5.55,-3.81) 6(5.55,-2.54) 7(5.55,-1.27) 8(5.55,0)
  silkscreen extent -0.15,-4.4 4.23,1.35
SOT23-5 [mm] "SOT23-5"
  rect 1.2x0.6 smd: 1(1.15,-0.95) 2(1.15,0) 3(1.15,0.95) 4(-1.15,0.95) 5(-1.15,-0.95)
  silkscreen extent -0.95,-1.65 0.95,1.65
SOT-23 [mil] "SOT-23"
  rect 40x50 smd: 1(0,0) 2(75,0)
  rect 35.98x50 smd: 3(37.5,80)
  silkscreen extent -20,-5 95,85
SOT-89 [mm] "SOT-89"
  rect 0.7x1.35 smd: 1(0,0) 3(3,0)
  rect 0.7x1.8 smd: 2(1.5,0.225)
  oct 1.9x3.3 smd: 2(1.5,2.775)
  silkscreen extent -0.79,0.88 3.79,3.29
SSOP-28 [mm] "SSOP-28"
  rect 2x0.38 smd: 1(0,0) 2(0,-0.65) 3(0,-1.3) 4(0,-1.95) 5(0,-2.6) 6(0,-3.25) 7(0,-3.9) 8(0,-4.55) 9(0,-5.2) 10(0,-5.85) 11(0,-6.5) 12(0,-7.15) 13(0,-7.8) 14(0,-8.45) 15(7.62,-8.45) 16(7.62,-7.8) 17(7.62,-7.15) 18(7.62,-6.5) 19(7.62,-5.85) 20(7.62,-5.2) 21(7.62,-4.55) 22(7.62,-3.9) 23(7.62,-3.25) 24(7.62,-2.6) 25(7.62,-1.95) 26(7.62,-1.3) 27(7.62,-0.65) 28(7.62,0)
  silkscreen extent 0.61,-8.8 6.22,1.09
TE-1776119-2 [mm]
  rect 2.4x2.4 hole 1.4: 1(0,0)
  round 2.4 hole 1.4: 2(5.08,0)
  silkscreen extent -2.54,-4.57 7.62,4.06
TP [mil] "TP"
  round 60 hole 32: 1(0,0)
  silkscreen extent -39,-39 39,39
TSSOP-24 [mm] "SSOP-28"
  rect 2x0.38 smd: 1(0,0) 2(0,-0.65) 3(0,-1.3) 4(0,-1.95) 5(0,-2.6) 6(0,-3.25) 7(0,-3.9) 8(0,-4.55) 9(0,-5.2) 10(0,-5.85) 11(0,-6.5) 12(0,-7.15) 13(6.6,-7.15) 14(6.6,-6.5) 15(6.6,-5.85) 16(6.6,-5.2) 17(6.6,-4.55) 18(6.6,-3.9) 19(6.6,-3.25) 20(6.6,-2.6) 21(6.6,-1.95) 22(6.6,-1.3) 23(6.6,-0.65) 24(6.6,0)
  silkscreen extent -0.15,-7.62 5.08,1.22
X-S_3000_01 [mm] "X-S_3000_01"
  round 8 smd: 1(0,0)
  rect 3.5x3.5 smd: 2(-7.9,0) 3(7.9,0)
  silkscreen extent -6.8,-11.55 6.8,7.1

## Part data
BT1: library part "Battery Holder CR12_16_20_25", "BATTERY HOLDER"
C1 C4 C5 C6 C7 C8 C9 C10 C11 C12 C13 C14 C15 C16 C17 C18 C19 C20 C21 C22 C23 C24 C25 C26 C27 C28 C29 C30 C31 C32 C33 C34 C35 C36 C37 C38 C39 C40 C41 C42 C43 C44 C45 C46 C47 C48 C49 C50 C51 C52 C53 C54 C55 C56 C57 C58 C59 C60 C61 C62 C63 C65 C67 C68 C69: library part CAP
C2 C3: library part CAP-TANT
D1: library part DIODE
D3: library part LED
J3: library part 1981584-1_0, "MicroUSB B port,5 Position,Right Angle,Gold Flash 1u"
J5: "Receptacle Assembly, 9 Position, Right Angle"
L1 L2 L3: library part "BEAD_ FERRITE", "Ferrite Bead,470OHM@100MHz,+/-25%,  200mA,"
LCD1: library part LCD_JY12298, "Display,FSTN,Positive,Reflective,JY12298,60.15x45.1mm"
Q1: library part QSB363CZR_0, "PT334-6C；EVERLIGHT;"
R1 R2 R3 R4 R5 R6 R7 R8 R9 R10 R11 R12 R13 R14 R15 R16 R17 R18 R19 R20 R21 R22 R23 R24 R25 R26 R27 R28 R29 R30 R31 R32 R33 R34 R35 R36 R37 R38 R39 R40 R41 R42 R43 R44 R45 R46 R47 R48 R49 R50 R51 R52 R54 R55 R56 R57 R58 R59 R60 R61 R62 R63 R64 R65 R66 R67 R68 R69 R70 R71 R72 R73 R74 R75 R76 R77 R78 R79: library part RES
TP1 TP2 TP3 TP4 TP5 TP6 TP7 TP8 TP9 TP10 TP11 TP12 TP13 TP17 TP18 TP19 TP20 TP21 TP22: library part TEST-POINT
U1: library part 78LXX
U3: library part FT232RL_2, "IC,USB to serial UART interface"
U5 U6: "IC,High Speed Optocoupler 1Mbd 15kV/μs CMR Transistor Output"
U7: library part TLV70033, "IC,200-mA  Low-IQ Low-Dropout Regulator"
U9: library part TI3485, "TI3485"
U10: library part AT24C512BN-SH25-SO8_1, "Two Wires Serial EEPROM"
U11: "IC,CryptoAuthentication,ATSHA204-SH-DA-T"
U12: library part AT25DF321_SU, "32 Mb Serial DataFlash"
X1: library part 12MHz, "Crystal,ABM3B-8.192MHz-B2-T,8.192MHz,+/-20PPM,18PF"
X2: library part XTAL-T

## Via types
v1: diameter 20, hole 12, Top Layer to Bottom Layer, 470 vias
v2: diameter 30, hole 15, Top Layer to Bottom Layer, 3 vias

## Nets (pads, with @x,y where several pads share a name; then routed paths per layer and width w, separated by ;. In a path a pad name is that pad's centre, name@x,y a point inside that pad or via, vN(x,y) a via of type N, cw(c..) or ccw(c..) an arc to the next point about the centre after c; other vN are vias at no path point)
3V3_ISO: C48.2 C51.2 C53.2 D4.A D5.A R27.2 R29.2 R32.2 TP13.1 U6.8 U7.5 | length 1775.1
  Top Layer w20: TP13.1@130,-1070 D4.A@130,-985 D5.A@130,-905 130,-870 150,-850 R27.2@480,-850 ; v1(355,-1100) 480,-1100 ; U7.5@479.72,-647.4 479.72,-694.72 515,-730 570,-730 570,-770 550,-790 520,-790 480,-830 R27.2@480,-850 ; v1(610,-1100) 480,-1100 ; 480,-1100 R27.2@480,-850
  Bottom Layer w15: R32.2@355,-1150 C51.2@415,-1210 ; C51.2@415,-1215 475,-1275 U6.8@475,-1330 ; C48.2@610,-1150 R29.2@670,-1150
  Bottom Layer w20: R32.2@355,-1150 v1(355,-1100) ; C48.2@610,-1150 v1(610,-1100)
3V3_SYS: C3.1 C5.2 C44.2 C45.2 C49.2 C50.2 C54.2 C55.1 C56.2 C58.1 C62.2 C63.2 C65.2 C67.2 D3.A D6.A J6.1 J6.2 JP6.1 JP7.1 Q1.2 R1.2 R16.2 R30.2 R31.2 R41.1 R42.2 R45.2 R46.2 R47.2 R48.2 R49.2 R54.2 R58.2 R59.2 R60.2 R61.2 R75.2 TP2.1 U1.1 U4.3 U5.8 U8.3 U9.8 U10.8 U11.8 U12.3 U12.7 U12.8 | length 16791
  Top Layer w12: D6.A@660,-2155 660,-2040 v1(710,-1990) ; C55.1@1565,-1000 1685,-1000 1701.18,-1016.18 U8.3@1701.18,-1070 ; 1610,-1000 1610,-1210 C56.2@1645,-1245 1645,-1265 1665,-1285 1735,-1285 R45.2@1775,-1245
  Top Layer w15: R41.1@1110,-455 C58.1@1175,-520 U9.8@1175,-631.5 1175,-695 1235,-755 1445,-755 ; R42.2@1370,-520 1445,-595 1445,-755 ; C54.2@1565,-910 1510,-910 1490,-890 1490,-800 1445,-755 ; R45.2@1780,-1245 2030,-1245 2135,-1140 U4.3@2135,-705
  Top Layer w20: J6.2@200,-3700 285,-3615 v2(285,-2075) ; C55.1@1565,-1000 C54.2@1565,-910 ; D3.A@2850,-975 TP2.1@3185,-975 ; v2(2875,-1875) 3115,-1875 3185,-1805 ; JP6.1@3330,-3450 JP7.1@3330,-1950
  Top Layer w30: R1.2@3115,-795 C5.2@3180,-795 C5.2@3185,-795 ; JP7.1@3330,-1950 3185,-1805 TP2.1@3185,-975 C5.2@3185,-795 ; U1.1@3550,-785 3520,-815 3305,-815 C3.1@3285,-795 C5.2@3185,-795
  Bottom Layer w12: R60.2@395,-4105 362.5,-4072.5 362.5,-4017.5 R59.2@395,-3985 ; 1129.76,-2055 1132.32,-2052.44 1260,-2052.44 1280,-2072.44 R48.2@1280,-2092.44 R49.2@1340,-2092.44 ; 1180,-2362.44 C62.2@1215,-2397.44 ; U10.8@1285,-2473.74 1285,-2600.43 1315,-2630.43 R47.2@1381.69,-2630.43 R46.2@1441.69,-2630.43 ; 2125,-2369.43 2125,-1990 ; R54.2@2251.69,-2050.43 2251.69,-1991.69
  Bottom Layer w15: J6.2@200,-3700 250,-3700 330,-3780 C67.2@330,-3865 R58.2@390,-3925 ; R61.2@395,-4165 R60.2@395,-4105 ; R59.2@395,-3985 R58.2@395,-3925 ; R31.2@435,-1905 C49.2@495,-1905 580,-1990 ; U5.8@630,-1720 630,-1780 C50.2@690,-1840 R30.2@750,-1900 ; 708.66,-1976.34 750,-1935 R30.2@750,-1905 ; 1129.76,-2312.2 1180,-2362.44 ; 1129.76,-2310 1129.76,-2055 1129.76,-1990.24 ; C62.2@1215,-2397.44 1215,-2447.44 1241.3,-2473.74 U10.8@1285,-2473.74 ; U11.8@1601.69,-2471.73 1559.29,-2471.73 1535,-2447.44 C63.2@1535,-2397.44 1560,-2372.44 2158.7,-2372.44 C65.2@2186.69,-2400.43 2186.69,-2469.13 2236.53,-2518.97 U12.8@2256.69,-2518.97 U12.7@2306.69,-2518.97 2306.69,-2370.75 2356.69,-2320.75 U12.3@2356.69,-2211.89 ; U4.3@2135,-705 2210,-780 2210,-870 R16.2@2305,-870 2305,-835 2320,-820 2520,-820 2600,-900 ; 2600,-945 2600,-900 ; C45.2@2840,-1115 D3.A@2840,-980 ; D3.A@2850,-975 2850,-920 2830,-900 2600,-900
  Bottom Layer w20: J6.1@100,-3700 J6.2@200,-3700 420,-3480 R75.2@420,-3215.91 ; v2(285,-2075) 370,-1990 580,-1990 v1@708.66,-1990 ; v1(710,-1990) 2125,-1990 2760,-1990 v2(2875,-1875)
CF1: J7.6 U2.22 | length 3827.2
  Top Layer w10: U2.22@2029.18,-4452.56 2029.18,-4554.18 v1(2075,-4600) ; v1(2350,-4600) 2940,-4600 3175,-4365 3175,-3875 3075,-3775 v1(3075,-3450)
  Bottom Layer w10: v1(2075,-4600) v1(2350,-4600) ; v1(3075,-3450) 3075,-2961.57 3200,-2836.57 3200,-2591.72 3236.72,-2555 3712.32,-2555 J7.6@3761.42,-2505.91
CF2: J7.5 U2.23 | length 3583.2
  Top Layer w10: U2.23@2048.86,-4452.56 2048.86,-4523.86 v1(2100,-4575) ; v1(2375,-4575) 2931.57,-4575 3050,-4456.57 v1(3050,-3475)
  Bottom Layer w10: v1(2100,-4575) v1(2375,-4575) ; v1(3050,-3475) 3050,-2958.28 3160,-2848.28 3160,-2841.72 3180,-2821.72 3180,-2583.43 3257.53,-2505.91 J7.5@3661.42,-2505.91
CF3: J7.8 U2.61 | length 2860.2
  Top Layer w10: U2.61@1891.38,-3841.92 1891.38,-3518.62 1970,-3440 2676.42,-3440 2870,-3246.42 2870,-2753.43 2943.43,-2680 v1(3250,-2680)
  Bottom Layer w10: v1(3250,-2680) 3585,-2680 3610,-2655 3712.32,-2655 J7.8@3761.42,-2605.91
CF4: J7.7 U2.19 | length 4068.8
  Top Layer w10: v1(1925,-4700) 1970.12,-4654.88 U2.19@1970.12,-4452.56 ; v1(2300,-4700) 2368.43,-4700 2398.43,-4670 2954.85,-4670 3235,-4389.85 3235,-3850.15 3150,-3765.15 v1(3150,-3375)
  Bottom Layer w10: v1(1925,-4700) v1(2300,-4700) ; v1(3150,-3375) 3095,-3320 3095,-2969.85 3220,-2844.85 3220,-2600 3245,-2575 3585,-2575 3615.91,-2605.91 J7.7@3661.42,-2605.91
COM0: LCD1.1 U2.90 | length 1541.7
  Top Layer w10: v1(1125,-3925) 1125,-3296.72 1172.31,-3249.41 LCD1.1@1418.5,-3249.41 ; v1(1275,-4175) 1303.39,-4175 1315,-4186.61 U2.90@1546.69,-4186.61
  Bottom Layer w10: v1(1125,-3925) 1125,-4045 1255,-4175 v1(1275,-4175)
COM1: LCD1.2 U2.96 | length 1982.4
  Top Layer w10: v1(1100,-4275) 1148.47,-4323.47 1438.75,-4323.47 1457.17,-4305.04 ; v1(1100,-3900) 1100,-3293.43 1218.43,-3175 1492.01,-3175 1518.5,-3201.5 LCD1.2@1518.5,-3249.41 ; 1457.17,-4304.72 U2.96@1546.69,-4304.72
  Bottom Layer w10: v1(1100,-4275) v1(1100,-3900)
COM2: LCD1.3 U2.100 | length 2225.5
  Top Layer w10: v1(1075,-4375) 1083.47,-4383.47 U2.100@1546.69,-4383.47 ; v1(1075,-3925) 1075,-3290.15 1210.15,-3155 1570,-3155 1618.5,-3203.5 LCD1.3@1618.5,-3249.41
  Bottom Layer w10: v1(1075,-4375) v1(1075,-3925)
COM3: LCD1.4 U2.64 | length 639.7
  Top Layer w10: v1(1820,-3455) 1820,-3690 1832.32,-3702.32 U2.64@1832.32,-3841.92
  Bottom Layer w10: LCD1.4@1718.5,-3249.41 1718.5,-3353.5 v1(1820,-3455)
COM4: LCD1.5 U2.83 | length 2175.1
  Top Layer w10: v1(1050,-4055) 1056.19,-4048.81 U2.83@1546.69,-4048.81 ; v1(1050,-3900) 1050,-3286.86 1201.86,-3135 1753.5,-3135 1818.5,-3200 LCD1.5@1818.5,-3249.41
  Bottom Layer w10: v1(1050,-4055) v1(1050,-3900)
COM5: LCD1.6 U2.82 | length 2302.8
  Top Layer w10: v1(1025,-4025) 1029.13,-4029.14 U2.82@1546.69,-4029.14 ; v1(1025,-3925) 1025,-3283.58 1193.58,-3115 1833.5,-3115 1918.5,-3200 LCD1.6@1918.5,-3249.41
  Bottom Layer w10: 1025,-4015 v1(1025,-3925)
CS: J7.15 U2.58 | length 2299.6
  Top Layer w10: U2.58@1950.44,-3841.93 1950.44,-3549.56 2000,-3500 2701.27,-3500 2930,-3271.27 2930,-3150 3000,-3080 v1(3185,-3080)
  Bottom Layer w10: v1(3185,-3080) 3259.09,-3005.91 J7.15@3661.42,-3005.91
CTS2: U2.73 U8.11 U9.2 | length 5050.3
  Top Layer w10: v1(650,-3100) 650,-2554.85 540,-2444.85 540,-2020 1225,-1335 v1(1225,-910) ; v1(1595,-3500) 1595,-3730 1655.16,-3790.16 U2.73@1655.16,-3841.93
  Top Layer w12: v1(1225,-910) U9.2@1225,-850 ; v1(1900,-960) 1905.9,-965.9 U8.11@1905.9,-1070
  Bottom Layer w10: v1(650,-3100) 650,-3414.85 735.15,-3500 v1(1595,-3500)
  Bottom Layer w12: v1(1225,-910) 1251,-936 1458.77,-936 1483.77,-961 1899,-961 v1(1900,-960)
DMA: J7.13 U2.6 | length 3995.1
  Top Layer w10: U2.6@1714.21,-4452.56 v1(1714.21,-4385.79) ; v1(2450,-4750) 2495,-4750 2515,-4730 2979.71,-4730 3300,-4409.71 3300,-3830.29 3225,-3755.29 3225,-3175 3275,-3125 v1(3275,-2905)
  Bottom Layer w10: v1(1714.21,-4385.79) 1714.21,-4569.21 1870,-4725 2340,-4725 2365,-4750 v1(2450,-4750) ; v1(3275,-2905) 3660.51,-2905 J7.13@3661.42,-2905.91
DRXD_MCU_ISO: R13.2 R35.1 U5.3 | length 381.8
  Top Layer w12: v1(775,-1125) R13.2@775,-1020
  Bottom Layer w12: v1(775,-1125) 750,-1150 R35.1@730,-1150 830,-1250 U5.3@830,-1330
DTXD_MCU_ISO: R14.2 R32.1 R34.1 R38.1 | length 718.5
  Top Layer w12: v1(295,-1110) 320,-1135 695,-1135 715,-1115 R14.2@715,-1020
  Bottom Layer w12: R38.1@235,-1150 R34.1@295,-1150 ; v1(295,-1110) R34.1@295,-1150 ; R32.1@355,-1210 R34.1@295,-1150
ERASE: C22.2 JP3.1 R10.1 U2.29 | length 797.4
  Top Layer w10: U2.29@2157.32,-4324.41 2221.3,-4324.41 2265,-4368.11 v1(2265,-4500)
  Bottom Layer w10: v1(2265,-4500) 2490,-4500 2550,-4560 C22.2@2610,-4560
  Bottom Layer w12: R10.1@2610,-4620 C22.2@2610,-4560 2670,-4500 JP3.1@2670,-4475
FWUP: C11.2 R5.1 S1.2 U2.35 | length 2511.5
  Top Layer w10: v1(1100,-5075) 1139.29,-5114.29 R5.1@1145,-5114.29 ; v1(1375,-5075) 1791.42,-5075 2335,-4531.42 2335,-4297.07 2244.23,-4206.3 U2.35@2157.33,-4206.3
  Top Layer w12: S1.2@1038.58,-5331.3 S1.2@1038.58,-4957.28 ; 1038.58,-5144.29 1145,-5144.29 ; C11.2@1145,-5174.29 1145,-5144.29 ; R5.1@1145,-5114.29 1145,-5144.29
  Bottom Layer w10: v1(1100,-5075) v1(1375,-5075)
GND: BT1.1 C1.1 C2.2 C3.2 C4.1 C5.1 C6.1 C7.1 C8.1 C9.1 C10.1 C11.1 C12.1 C13.1 C14.1 C15.1 C16.1 C17.1 C18.1 C19.1 C20.1 C21.1 C22.1 C23.1 C24.1 C25.1 C26.1 C27.1 C28.1 C29.1 C30.1 C31.1 C32.1 C33.1 C34.1 C35.1 C36.1 C37.1 C38.1 C39.1 C44.1 C49.1 C50.1 C54.1 C55.2 C58.2 C59.1 C62.1 C63.1 C65.1 C67.1 C68.1 C69.1 D2.K J2.2 J5.5 J6.4 J6.6 J6.8 J6.10 J6.12 J6.14 J6.16 J6.18 J6.20 J7.2 J8.2 J8.19 PW1.2 PW1.3 Q3.2 R4.1 R7.2 R10.2 R23.1 R25.1 R39.1 R44.1 R50.1 R51.1 R76.1 R77.1 S1.1 S2.1 S3.1 S4.1 S5.1 TP5.1 TP6.1 TP17.1 TP18.1 TP19.1 TP20.1 TP21.1 U1.2 U2.4 U2.42 U2.52 U2.78 U4.2 U5.5 U8.5 U8.19 U8.23 U9.5 U10.3 U10.4 U10.7 U11.4 U12.4 X1.2 X1.4 | length 529.1
  Top Layer w10: U2.42@2157.33,-4068.5 2366.5,-4068.5 v1(2375,-4060)
  Top Layer w15: C54.1@1565,-830 1610,-875 1665,-875 1675.59,-864.41 U8.23@1675.59,-810.16
  Bottom Layer w15: R39.1@930,-1840 U5.5@930,-1720
  other v1: 500,-5250 750,-5250 1750,-5250 2000,-5250 2250,-5250 3250,-5250 3500,-5250 2635,-5075 2825,-5075 250,-5000 500,-5000 750,-5000 2250,-5000 3250,-5000 3500,-5000 3750,-5000 1600,-4940 1700,-4940 1800,-4940 2700,-4900 950,-4850 3100,-4800 250,-4750 3500,-4750 3750,-4750 600,-4700 750,-4700 3300,-4600 450,-4550 600,-4550 750,-4550 3500,-4500 3750,-4500 2150,-4470 1310,-4450 1410,-4450 1500,-4450 2870,-4420 450,-4400 600,-4400 3100,-4380 1875,-4375 1950,-4375 2050,-4375 1760,-4365 1615,-4300 1700,-4300 1950,-4300 2050,-4300 2585,-4285 1850,-4275 2025,-4250 3500,-4250 3750,-4250 1850,-4225 1900,-4225 2700,-4225 2825,-4215 2900,-4215 3100,-4200 2400,-4175 1850,-4150 1900,-4150 1950,-4150 2700,-4150 2840,-4110 2970,-4100 3100,-4100 2085,-4090 2475,-4060 2575,-4060 2675,-4060 1640,-4010 1750,-4000 1825,-4000 3750,-4000 2000,-3975 3350,-3950 1725,-3925 1800,-3925 1975,-3925 2275,-3900 1460,-3890 2425,-3875 3090,-3850 2725,-3825 1540,-3810 1200,-3800 3350,-3800 390,-3770 2325,-3750 3750,-3750 1200,-3700 2775,-3700 3450,-3700 2450,-3625 2650,-3625 150,-3600 3370,-3600 2850,-3540 480,-3530 3265,-3500 3600,-3500 1200,-3350 1300,-3350 1400,-3350 1500,-3350 150,-3300 3450,-3300 3275,-3250 1250,-3210 1350,-3210 1560,-3200 1660,-3180 1740,-3180 1850,-3180 2030,-3180 2140,-3170 2240,-3170 2340,-3170 2440,-3170 1950,-3150 2650,-3150 2080,-3110 2180,-3110 2280,-3110 2380,-3110 2500,-3000 1250,-2900 1500,-2900 1750,-2900 2000,-2900 2250,-2900 2950,-2825 3000,-2775 3475,-2775 2650,-2750 2500,-2700 1500,-2650 1750,-2650 2000,-2650 3475,-2625 1200,-2600 2950,-2600 2000,-2500 2500,-2500 2650,-2500 3000,-2500 1150,-2450 2245,-2420 1325,-2375 1425,-2375 2285,-2305 450,-2300 2000,-2300 2500,-2250 3000,-2250 3600,-2200 2205,-2185 2650,-2150 3250,-2150 150,-2100 450,-2100 1500,-2100 1750,-2100 2000,-2100 3450,-2100 2850,-2050 3250,-2050 3000,-2000 3800,-2000 3250,-1950 1175,-1900 560,-1875 150,-1850 560,-1800 1275,-1800 1500,-1800 1750,-1800 2000,-1800 2250,-1800 2500,-1800 2800,-1800 3350,-1750 1375,-1700 3000,-1700 2230,-1580 2420,-1570 2610,-1560 1970,-1550 2080,-1550 2310,-1550 2750,-1500 3000,-1500 3350,-1500 3750,-1500 1700,-1400 1800,-1400 1900,-1400 2030,-1390 2130,-1370 2200,-1370 2350,-1350 2700,-1300 1900,-1280 2050,-1280 1150,-1250 1350,-1250 1500,-1250 2150,-1250 3000,-1250 3350,-1250 1900,-1190 2000,-1150 2450,-1150 2700,-1150 1475,-1125 1150,-1100 2200,-1030 3100,-1025 2000,-1000 3350,-1000 3750,-1000 2200,-950 2000,-850 1400,-810 2280,-770 2500,-750 2750,-750 1500,-730 1270,-710 2000,-700 1400,-670 3150,-650 1500,-600 3400,-600 2500,-550 2750,-550 1750,-500 2350,-500 3800,-450 1150,-350 1050,-300 1750,-250 2050,-250 2350,-250 3500,-250 3000,-100
GND_ISO: C40.1 C41.1 C42.1 C43.1 C46.1 C47.1 C48.1 C51.1 C52.1 C53.1 J3.5 R24.2 R28.2 R40.1 TP22.1 U3.7 U3.8 U3.18 U3.21 U3.24 U3.25 U6.5 U7.2 | length 478.5
  Top Layer w15: J3.5@200.55,-696.18 261.18,-696.18 285,-720 385,-720 395,-710 C47.1@395,-685 C46.1@395,-620 C43.1@395,-555
  Bottom Layer w15: U6.5@175,-1330 R40.1@175,-1215
  other v1: 50,-1300 500,-1200 900,-1200 50,-1100 665,-1100 225,-1075 340,-1040 900,-1000 645,-910 430,-890 670,-890 50,-875 775,-850 235,-800 350,-800 900,-800 760,-795 450,-790 620,-780 450,-730 800,-600 900,-600 50,-425 250,-425 450,-425 525,-425 775,-425
IRQ0: J7.9 U2.60 | length 2692.5
  Top Layer w10: U2.60@1911.07,-3841.92 1911.07,-3528.93 1980,-3460 2684.71,-3460 2890,-3254.71 2890,-2761.72 2946.72,-2705 v1(3275,-2705)
  Bottom Layer w10: v1(3275,-2705) J7.9@3660.51,-2705
IRQ1: J7.12 U2.2 | length 4466.5
  Top Layer w10: v1(1525,-4510) 1624.84,-4510 1635.47,-4499.38 U2.2@1635.47,-4452.56 ; v1(2325,-4775) 2350,-4775 2415,-4710 2971.42,-4710 3275,-4406.42 3275,-3833.58 3200,-3758.58 v1(3200,-3325)
  Bottom Layer w10: v1(1525,-4510) 1525,-4703.28 1596.72,-4775 v1(2325,-4775) ; v1(3200,-3325) 3135,-3260 3135,-2986.42 3266.42,-2855 3712.32,-2855 J7.12@3761.42,-2805.91
NetC1_2: C1.2 U2.50 X1.1 | length 587.3
  Top Layer w10: U2.50@2157.32,-3911.02 2157.32,-3887.68 2180,-3865 2365,-3865 2425,-3805 2540,-3805 2565.19,-3830.19 X1.1@2565.19,-3867.04 2606.49,-3867.04 C1.2@2630,-3890.55
NetC6_2: C6.2 U2.51 X1.3 | length 625.4
  Top Layer w10: U2.51@2088.23,-3841.93 2358.02,-3841.93 X1.3@2478.58,-3721.37 2529.95,-3670 2600,-3670 C6.2@2630,-3700
NetC7_2: C7.2 U2.40 X2.1 | length 439.6
  Top Layer w10: U2.40@2157.33,-4107.87 2287.87,-4107.87 2424.76,-4244.76 X2.1@2470,-4244.76 ; X2.1@2484.76,-4230 C7.2@2555,-4230
NetC8_2: C8.2 U2.41 X2.2 | length 408.1
  Top Layer w10: U2.41@2157.33,-4088.19 2303.19,-4088.19 2361.34,-4146.34 X2.2@2470,-4146.34 ; X2.2@2483.66,-4160 C8.2@2555,-4160
NetC38_2: C38.2 R11.1 | length 172.8
  Bottom Layer w10: R11.1@2115,-3750 2115,-3730 2135,-3710 2210,-3710 C38.2@2245,-3745
NetC39_2: C39.2 R12.1 | length 179.3
  Bottom Layer w10: C39.2@1315,-3840 1285,-3870 1285,-3945 1310,-3970 R12.1@1325,-3970 ; C39.2@1325,-3851.5 C39.2@1325,-3840
NetC40_2: C40.2 R22.1 U3.4 U3.17 | length 971.4
  Top Layer w12: v1(590,-825) 665,-825 v1(755,-915)
  Bottom Layer w12: C40.2@445,-1065 755,-1065 768.23,-1051.77 U3.4@768.23,-995 768.23,-928.23 v1(755,-915) ; R22.1@510,-560 563.5,-613.5 U3.17@563.5,-695 563.5,-798.5 v1(590,-825)
NetC43_2: C43.2 J3.1 L3.1 | length 217.8
  Top Layer w15: J3.1@200.55,-593.82 256.18,-593.82 291.18,-558.82 C43.2@328.82,-558.82 ; C43.2@330,-555 L3.1@330,-480
NetC45_1: C45.1 D3.K Q2.2 | length 215
  Bottom Layer w12: Q2.2@2750,-1190 C45.1@2750,-1115 D3.K@2750,-975
NetC46_2: C46.2 J3.2 R15.1 | length 168.9
  Top Layer w10: J3.2@200.55,-619.41 v1@279.41,-619.41 ; v1(280,-620) C46.2@330,-620
  Bottom Layer w10: v1(280,-620) R15.1@320,-620
NetC47_2: C47.2 J3.3 R17.1 | length 186
  Top Layer w10: J3.3@200.55,-645 265,-645 v1(280,-660) 305,-660 C47.2@330,-685
  Bottom Layer w10: v1(280,-660) R17.1@320,-660
NetC56_1: C56.1 U8.1 | length 110
  Top Layer w12: C56.1@1650,-1180 U8.1@1650,-1070
NetC57_1: C57.1 U8.20 | length 81.8
  Top Layer w12: C57.1@1750,-700 1752.36,-702.36 C57.1@1752.36,-707.64 ; 1752.36,-770 C57.1@1752.36,-707.64 ; C57.1@1760,-700 C57.1@1752.36,-707.64
NetC57_2: C57.2 U8.6 | length 516.6
  Top Layer w12: v1(1750,-880) 1765,-895 1765,-975 1777.95,-987.95 U8.6@1777.95,-1070 ; C57.2@1750,-635 v1(1750,-600)
  Bottom Layer w12: v1(1750,-880) v1(1750,-600)
NetC59_2: C59.2 U8.21 | length 125.4
  Top Layer w12: C59.2@1690,-700 1726.77,-736.77 U8.21@1726.77,-810.16
NetC60_1: C60.1 U8.4 | length 194.1
  Top Layer w12: C60.1@1710,-1245 1741.5,-1213.5 1741.5,-1146.5 1726.77,-1131.77 U8.4@1726.77,-1070
NetC60_2: C60.2 U8.2 | length 124.3
  Top Layer w12: U8.2@1675.59,-1070 1675.59,-1145.59 C60.2@1710,-1180
NetC61_1: C61.1 U8.22 | length 166
  Top Layer w12: C61.1@1630,-700 1630,-725 1650,-745 1695,-745 1701.18,-751.18 U8.22@1701.18,-810.16
NetC61_2: C61.2 U8.24 | length 212.4
  Top Layer w12: C61.2@1630,-635 1595,-670 1595,-735 1650,-790 U8.24@1650,-810.16
NetD1_A: D1.A PW1.1 | length 367.9
  Top Layer w30: PW1.1@3000,-549.37 3224.37,-325 D1.A@3275,-325
NetD2_A: D2.A R1.1 | length 70
  Top Layer w15: D2.A@3055,-730 R1.1@3115,-730 R1.1@3125,-730
NetD4_K: D4.K R21.2 | length 65
  Top Layer w12: D4.K@225,-980 R21.2@290,-980
NetD5_K: D5.K R26.2 | length 65
  Top Layer w12: D5.K@225,-910 R26.2@290,-910
NetD6_K: D6.K R52.2 | length 65
  Top Layer w10: R52.2@660,-2300 D6.K@660,-2235
NetJ3_6: J3.6 J3.7 J3.8 J3.9 J3.10 J3.11 R24.1 | length 648
  Top Layer w30: J3.7@94.25,-782.8 161.18,-782.8 J3.9@200.55,-743.43 ; J3.6@94.25,-507.2 J3.6@95,-507.2 ; J3.7@95,-782.17 J3.6@95,-507.2 ; J3.8@200.55,-546.57 161.18,-507.2 J3.6@95,-507.2
  Bottom Layer w30: J3.9@200.55,-743.43 R24.1@328.43,-743.43
NetJ4_1: J4.1 R42.1 R43.1 U9.6 | length 545.9
  Top Layer w12: J4.1@1225,-185 1225,-285 1370,-430 R42.1@1370,-455 R43.1@1305,-520 1305,-555 1275,-585 U9.6@1275,-631.5
NetJ4_2: J4.2 R43.2 R44.2 U9.7 | length 627
  Top Layer w12: J4.2@1025,-185 1075,-185 1310,-420 R43.2@1310,-455 ; U9.7@1225,-631.5 1225,-575 1240,-560 R44.2@1240,-520 R43.2@1305,-455
NetJ5_2: J5.2 U8.15 | length 472.1
  Top Layer w12: U8.15@1880.31,-810.16 1880.31,-689.69 v1(2035,-535)
  Bottom Layer w12: J5.2@1955.94,-434.92 1955.94,-455.94 v1(2035,-535)
NetJ5_3: J5.3 U8.18 | length 483.5
  Top Layer w12: U8.18@1803.54,-810.16 1803.54,-753.66 1836.31,-720.89 1836.31,-663.61 J5.3@2065,-434.92
NetJ5_7: J5.7 U8.17 | length 698.4
  Top Layer w12: U8.17@1829.13,-810.16 1829.13,-759.18 1858.31,-730 1858.31,-672.72 2026.03,-505 2081.03,-505 2120,-466.03 2120,-410 2033.11,-323.11 J5.7@2010.47,-323.11
NetJ5_8: J5.8 U8.14 | length 735.3
  Top Layer w12: U8.14@1905.9,-810.16 1905.9,-704.1 2080,-530 2180,-530 2225,-485 2225,-405 2143.11,-323.11 J5.8@2119.53,-323.11
NetJ5_10: J5.10 J5.11 R77.2 | length 1678.7
  Bottom Layer w30: R77.2@1575,-565 J5.10@1575,-380.94
  Bottom Layer w100: J5.10@1573.07,-379.02 1573.07,-156.93 1650,-80 2485,-80 2556.93,-151.93 J5.11@2556.93,-379.02
NetJ6_3: J6.3 R58.1 | length 281.8
  Bottom Layer w12: J6.3@100,-3800 150,-3850 250,-3850 325,-3925 R58.1@330,-3925